# EAGLE board tnychron_1_3 (EAGLE 6.1)
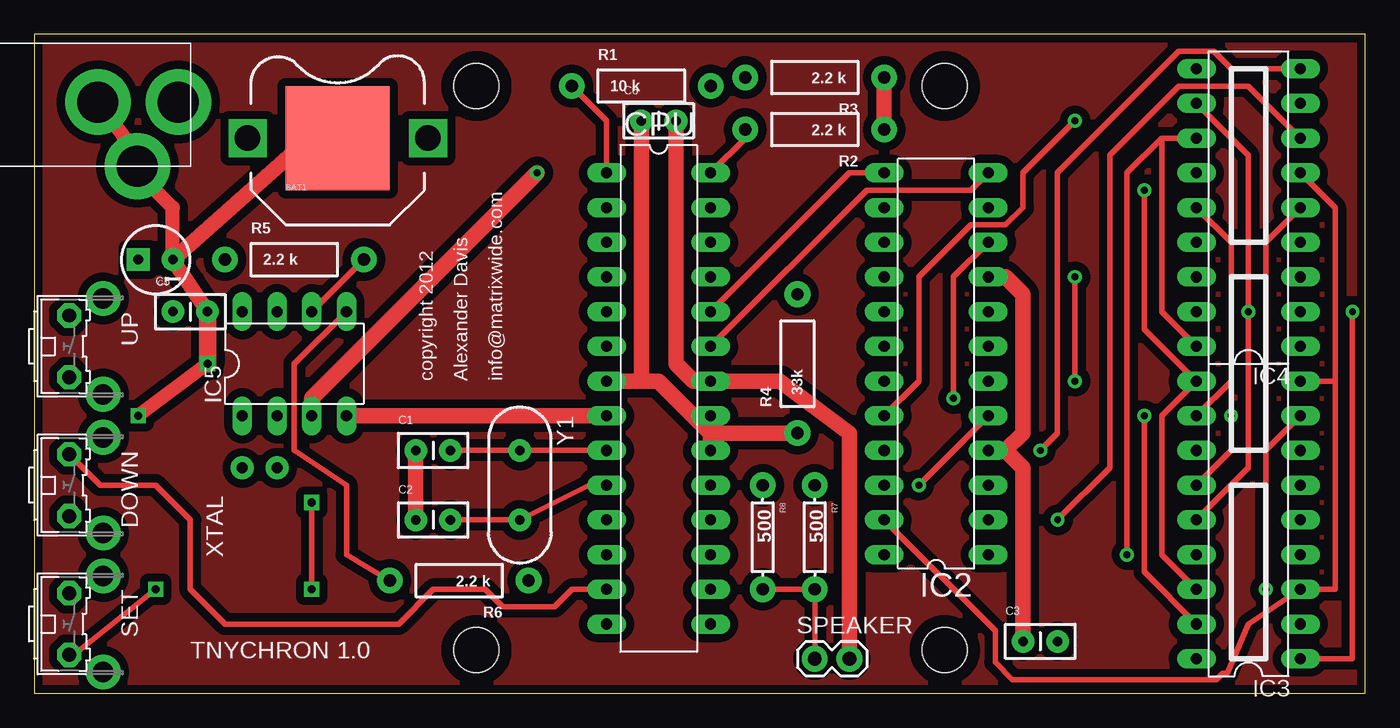
[diagram p0: board, top side]
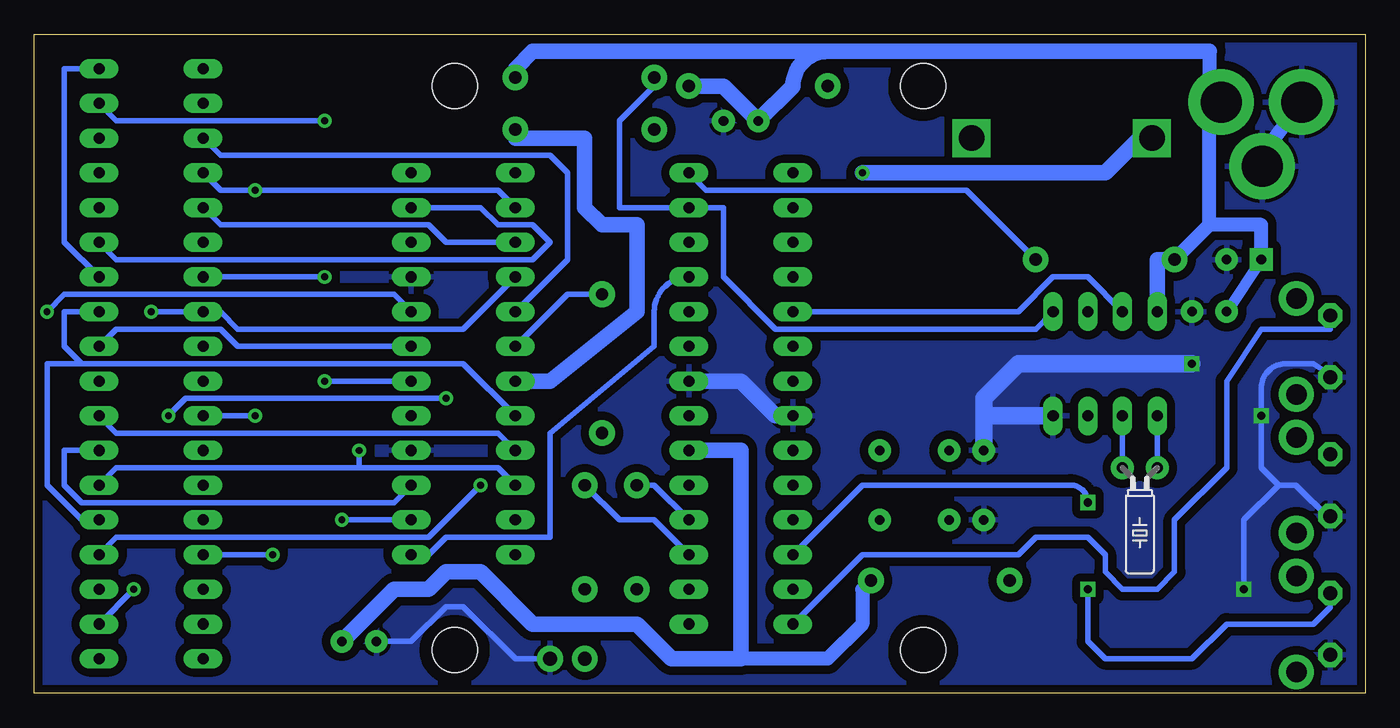
[diagram p1: board, bottom side, seen from below]

Size 97.46 x 48.25 mm. Coordinates in mm from the lower left corner, seen from the top.
Outline: 0,0 97.46,0 97.46,48.25 0,48.25 0,0
Copper layers (1*16): Top 0.035mm / dielectric 1.5mm / Bottom 0.035mm
Design rules: minimum track width 8mil, minimum drill 20mil, track to track 8mil, track to pad 8mil, pad to pad 8mil, via to via 8mil, smd to smd 8mil, copper to edge 10mil, drill to drill 8mil, minimum pad ring 12mil, minimum via ring 10mil, stop-mask expansion 4mil, vias tented up to drill 25mil, thermal gap 10mil
Net classes: 0 default: width 0.406 mm; 1 supply: width 1.143 mm

## Footprints (pad centres in the part's own frame; a part is rotated, then mirrored left to right if it is on the bottom)
BATTCON_12MM_PTH = smd 7.62 x 7.62: GND 0,0 | drill 1.854 square: VCC@1 -6.604,0; VCC@2 6.604,0
CAP-PTH-SMALL2 = drill 0.7 pad 1.651: 1 0,0; 2 2.54,0
CPOL-RADIAL-10UF-25V = drill 0.7 pad 1.651 square: 1 1.27,0 | drill 0.7 pad 1.651: 2 -1.27,0
DIL28-3 = drill 0.813 long: 1 -16.51,-3.81; 2 -13.97,-3.81; 3 -11.43,-3.81; 4 -8.89,-3.81; 5 -6.35,-3.81; 6 -3.81,-3.81; 7 -1.27,-3.81; 8 1.27,-3.81; 9 3.81,-3.81; 10 6.35,-3.81; 11 8.89,-3.81; 12 11.43,-3.81; 13 13.97,-3.81; 14 16.51,-3.81; 15 16.51,3.81; 16 13.97,3.81; 17 11.43,3.81; 18 8.89,3.81; 19 6.35,3.81; 20 3.81,3.81; 21 1.27,3.81; 22 -1.27,3.81; 23 -3.81,3.81; 24 -6.35,3.81; 25 -8.89,3.81; 26 -11.43,3.81; 27 -13.97,3.81; 28 -16.51,3.81
B3F-31XX = drill 1.016 pad 1.778 octagon: 1 -2.261,-1.245; 2 2.261,-1.245 | drill 1.499 pad 2.54: 3 -3.505,1.245; 4 3.505,1.245
DIL24-3 = drill 0.813 long: 1 -13.97,-3.81; 2 -11.43,-3.81; 3 -8.89,-3.81; 4 -6.35,-3.81; 5 -3.81,-3.81; 6 -1.27,-3.81; 7 1.27,-3.81; 8 3.81,-3.81; 9 6.35,-3.81; 10 8.89,-3.81; 11 11.43,-3.81; 12 13.97,-3.81; 13 13.97,3.81; 14 11.43,3.81; 15 8.89,3.81; 16 6.35,3.81; 17 3.81,3.81; 18 1.27,3.81; 19 -1.27,3.81; 20 -3.81,3.81; 21 -6.35,3.81; 22 -8.89,3.81; 23 -11.43,3.81; 24 -13.97,3.81
DIL18 = drill 0.813 long: 1 -10.16,-3.81; 2 -7.62,-3.81; 3 -5.08,-3.81; 4 -2.54,-3.81; 5 0,-3.81; 6 2.54,-3.81; 7 5.08,-3.81; 8 7.62,-3.81; 9 10.16,-3.81; 10 10.16,3.81; 11 7.62,3.81; 12 5.08,3.81; 13 2.54,3.81; 14 0,3.81; 15 -2.54,3.81; 16 -5.08,3.81; 17 -7.62,3.81; 18 -10.16,3.81
DIL08 = drill 0.813 long: 1 -3.81,-3.81; 2 -1.27,-3.81; 3 1.27,-3.81; 4 3.81,-3.81; 5 3.81,3.81; 6 1.27,3.81; 7 -1.27,3.81; 8 -3.81,3.81
AXIAL-0.4 = drill 0.9 pad 1.88: P$1 -5.08,0; P$2 5.08,0
AXIAL-0.3 = drill 0.9 pad 1.88: P$1 -3.81,0; P$2 3.81,0
1X02 = drill 1.016 pad 1.88: 1 0,0; 2 2.54,0
PJ-102A = drill 3 pad 4.8: RING 0.1,-3.39; RING_SW -4.6,-6.29; TIP 0.1,-9.29
STAND-OFF = hole 3.302: 0,0
TC26H = drill 0.813 pad 1.676: 1 -1.27,0; 2 1.27,0
HC49US = drill 0.7 pad 1.651: 1 -2.54,0; 2 2.54,0

## Placement (x,y rotation side)
BAT1  3v  [BATTCON_12MM_PTH]  22.22,40.64 0 top
C1  18 pf  [CAP-PTH-SMALL2]  27.94,17.78 0 top
C2  18 pf  [CAP-PTH-SMALL2]  27.94,12.7 0 top
C3  0.1 uf  [CAP-PTH-SMALL2]  72.39,3.81 0 top
C4  10 uf  [CPOL-RADIAL-10UF-25V]  8.89,31.75 180 top
C5  0.1 uf  [CAP-PTH-SMALL2]  10.16,27.94 0 top
C6  0.1 uf  [CAP-PTH-SMALL2]  44.45,41.91 0 top
CPU  ATMEGA328-PU  [DIL28-3]  45.72,21.59 270 top
DOWN  [B3F-31XX]  3.81,15.24 270 top
IC2  MAX7219CNG  [DIL24-3]  66.04,24.13 90 top
IC3  socket a  [DIL18]  88.9,12.7 90 top
IC4  socket b  [DIL18]  88.9,35.56 90 top
IC5  DS1307  [DIL08]  19.05,24.13 0 top
R1  10 k  [AXIAL-0.4]  44.45,44.45 0 top
R2  2.2 k  [AXIAL-0.4]  57.15,41.28 180 top
R3  2.2 k  [AXIAL-0.4]  57.15,45.08 180 top
R4  33k  [AXIAL-0.4]  55.88,24.13 90 top
R5  2.2 k  [AXIAL-0.4]  19.05,31.75 0 top
R6  2.2 k  [AXIAL-0.4]  31.11,8.25 180 top
R7  500  [AXIAL-0.3]  57.15,11.43 270 top
R8  500  [AXIAL-0.3]  53.34,11.43 270 top
SET  [B3F-31XX]  3.81,5.08 270 top
SPEAKER  [1X02]  57.15,2.54 0 top
U$1  2.1MMJACKTHM  [PJ-102A]  1.27,43.18 90 top
U$4  [STAND-OFF]  66.67,44.45 0 top
U$5  [STAND-OFF]  32.38,44.45 0 top
U$6  [STAND-OFF]  32.38,3.18 0 top
U$7  [STAND-OFF]  66.67,3.18 0 top
UP  [B3F-31XX]  3.81,25.4 270 top
XTAL  32.768 khz  [TC26H]  16.51,16.51 180 bottom
Y1  16 mhz  [HC49US]  35.56,15.24 270 top

## Library data of the parts
BAT1 C1-C6 R1-R8 SPEAKER U$4-U$7 XTAL Y1 = SparkFun
CPU = Arduino-AVR
DOWN IC5 SET U$1 UP = adafruit
IC2 = maxim; MF: MAXIM; MPN: MAX7219CNG; OC_FARNELL: 1523914; OC_NEWARK: 34C4018
IC3 IC4 = ic-package

## Nets
GND [supply]: BAT1.GND C1.1 C2.1 C3.1 C4.2 C5.2 C6.2 CPU.8 CPU.22 DOWN.2 IC2.4 IC2.9 IC5.4 SET.2 SPEAKER.2 U$1.RING U$1.RING_SW UP.2
N$1: CPU.18 R8.P$1
N$2: CPU.1 R1.P$1
N$3: C1.2 CPU.9 Y1.1
N$4: C2.2 CPU.10 Y1.2
N$5: IC2.2 IC4.7
N$6: IC2.11 IC4.4
N$7: CPU.28 IC5.6 R2.P$2 R5.P$2
N$8: CPU.27 IC5.5 R3.P$2 R6.P$2
N$9: CPU.5 IC5.7
N$10: CPU.17 R7.P$1
N$11: IC2.6 IC4.16
N$12: IC2.7 IC4.1
N$13: IC2.18 R4.P$2
N$14: IC2.3 IC3.7
N$15: CPU.23 IC2.12
N$16: CPU.24 IC2.13
N$17: CPU.25 IC2.1
N$18: IC2.10 IC3.13
N$19: IC5.1 XTAL.1
N$20: IC2.5 IC3.4
N$21: IC2.8 IC3.1
N$22 [supply]: BAT1.VCC@1 IC5.3
N$23: IC2.14 IC3.10 IC3.16 IC4.13
N$24: IC2.16 IC3.14 IC4.11 IC4.17
N$25: IC2.20 IC3.5 IC4.2 IC4.8
N$26: IC2.23 IC3.3 IC3.9 IC4.6
N$27: IC2.21 IC3.2 IC3.8 IC4.5
N$28: CPU.12 SET.1
N$29: CPU.13 DOWN.1
N$30: IC2.15 IC3.11 IC3.17 IC4.14
N$31: IC2.17 IC3.15 IC4.12 IC4.18
N$32: IC2.22 IC3.6 IC4.3 IC4.9
N$33: CPU.14 UP.1
N$34: R7.P$2 R8.P$2 SPEAKER.1
N$35: IC5.2 XTAL.2
VCC [supply]: C3.2 C4.1 C5.1 C6.1 CPU.7 CPU.20 CPU.21 IC2.19 IC5.8 R1.P$2 R2.P$1 R3.P$1 R4.P$1 R5.P$1 R6.P$1 U$1.TIP

## Tracks (layer width: path | path; a pad name or v marks a point on that pad's centre or on a via)
GND  (via drill 0.6)
  Top 0.406: 21.59,43.81 21.59,41.91 21.59,40.64 | v8.89,7.62 2.54,2.54
  Top 1.016: C4.2 10.16,35.56 7.62,38.1 U$1.RING_SW 7.62,39.37 U$1.RING | v12.7,24.13 v7.62,20.32
  Top 1.143: C5.2 C4.2 21.59,41.91 BAT1.GND | 71.12,17.78 72.39,16.51 C3.1 | IC2.9 71.12,30.48 72.39,29.21 72.39,19.05 71.12,17.78 | 71.12,17.78 IC2.4 | IC5.4 CPU.8 | C1.1 C2.1 | C6.2 46.99,24.13 48.26,22.86 CPU.22 54.61,22.86 59.69,19.05 SPEAKER.2
  Top 1.27: C5.2 v12.7,24.13
  Bottom 0.406: SPEAKER.2 62.23,2.54 66.04,6.35 67.31,6.35 69.85,3.81 C3.1 | UP.2 2.26,23.14 3.81,24.13 5.82,24.13 arc-90 7.62,22.33 v7.62,20.32 7.62,16.51 6.35,15.24 | 2.54,12.7 5.08,15.24 6.35,15.24 | 6.35,15.24 8.89,12.7 v8.89,7.62
  Bottom 1.016: U$1.RING 7.62,39.37
  Bottom 1.143: CPU.22 45.72,22.86 43.18,20.32 CPU.8
  Bottom 1.27: v12.7,24.13 25.4,24.13 27.94,21.59 27.94,20.32 | 27.94,20.32 C1.1 | IC5.4 27.94,20.32
  pour Bottom (isolate 0.61): 97.79,0 97.79,48.26 0,48.26 0,0
N$1
  Bottom 0.406: CPU.18 52.07,15.24 R8.P$1
N$2
  Top 0.406: CPU.1 41.91,41.91 R1.P$1
N$3
  Top 0.406: CPU.9 Y1.1 C1.2
N$4
  Top 0.406: CPU.10 40.64,15.24 Y1.2 C2.2
N$5  (via drill 0.51)
  Top 0.406: v74.93,12.7 78.74,16.51 78.74,39.37 83.82,44.45 88.9,44.45 IC4.7
  Bottom 0.406: v74.93,12.7 IC2.2
N$6
  Bottom 0.406: IC2.11 64.77,35.56 63.5,34.29 60.96,34.29 59.69,33.02 60.96,31.75 91.44,31.75 IC4.4
N$7
  Top 0.406: CPU.28 52.07,40.64 R2.P$2 | R5.P$2 IC5.6
  Bottom 0.406: CPU.28 48.26,36.83 29.21,36.83 R5.P$2
N$8
  Top 0.406: IC5.5 19.05,24.13 19.05,17.78 22.86,15.24 22.86,10.16 R6.P$2
  Bottom 0.406: IC5.5 24.13,26.67 43.18,26.67 46.99,30.48 46.99,35.56 CPU.27 54.61,35.56 54.61,41.91 52.07,44.45 R3.P$2
N$9
  Bottom 0.406: IC5.7 20.32,30.48 22.86,30.48 25.4,27.94 CPU.5
N$10
  Bottom 0.406: CPU.17 52.07,12.7 54.61,12.7 R7.P$1
N$11  (via drill 0.51)
  Top 0.406: v76.2,30.48 v76.2,22.86
  Bottom 0.406: v76.2,22.86 IC2.6 | IC4.16 v76.2,30.48
N$12
  Bottom 0.406: IC2.7 82.55,25.4 83.82,26.67 91.44,26.67 IC4.1
N$13
  Bottom 0.406: IC2.18 58.42,29.21 R4.P$2
N$14
  Bottom 0.406: IC2.3 71.12,13.97 93.98,13.97 95.25,15.24 95.25,17.78 IC3.7
N$15
  Top 0.406: CPU.23 60.96,36.83 68.58,36.83 IC2.12
N$16
  Top 0.406: CPU.24 59.69,38.1 IC2.13
N$17
  Bottom 0.406: CPU.25 arc-90 52.07,27.94 52.07,25.4 59.69,19.05 59.69,11.43 67.31,11.43 68.58,10.16 IC2.1
N$18  (via drill 0.51)
  Top 0.406: IC3.13 87.63,17.78 v87.63,20.32 | v67.31,21.59 67.31,30.48 IC2.10
  Bottom 0.406: v87.63,20.32 86.36,21.59 v67.31,21.59
N$19
  Bottom 0.406: XTAL.1 IC5.1
N$20  (via drill 0.51)
  Top 0.406: v64.77,15.24 IC2.5
  Bottom 0.406: v64.77,15.24 68.58,11.43 91.44,11.43 IC3.4
N$21  (via drill 0.51)
  Top 0.406: IC3.1 96.52,2.54 v96.52,27.94
  Bottom 0.406: v96.52,27.94 95.25,29.21 71.12,29.21 IC2.8
N$22  (via drill 0.51)
  Top 1.143: IC5.3 20.32,21.59 v36.83,38.1
  Bottom 1.143: v36.83,38.1 19.05,38.1 16.51,40.64 BAT1.VCC@1
N$23  (via drill 0.51)
  Top 0.406: IC3.16 82.55,10.16 82.55,20.32 IC3.10 81.28,26.67 v81.28,36.83
  Bottom 0.406: IC2.14 63.5,36.83 v81.28,36.83 83.82,36.83 IC4.13
N$24  (via drill 0.51)
  Top 0.406: IC3.14 88.9,16.51 v88.9,27.94 88.9,39.37 IC4.11
  Bottom 0.406: IC2.16 66.04,26.67 82.55,26.67 83.82,27.94 IC4.17 v88.9,27.94
N$25  (via drill 0.51)
  Top 0.406: v76.2,41.91 72.39,38.1 72.39,35.56 71.12,34.29 68.58,34.29 64.77,30.48 64.77,22.86 IC2.20
  Bottom 0.406: IC2.20 66.04,24.13 93.98,24.13 | 93.98,24.13 95.25,25.4 95.25,27.94 IC4.2 | IC3.5 93.98,12.7 96.52,15.24 96.52,24.13 93.98,24.13 | IC4.8 91.44,41.91 v76.2,41.91
N$26
  Top 0.406: 95.25,22.86 95.25,35.56 IC4.6 | IC2.23 70.36,4.57 70.36,2.29 71.63,1.02 86.54,1.02 87.02,1.5 87.36,1.5 88.9,5.08 IC3.3 95.25,7.62 95.25,22.86 | 95.25,22.86 IC3.9
N$27  (via drill 0.51)
  Top 0.406: 90.17,17.78 v90.17,7.62 | IC3.8 90.17,17.78 | IC4.5 90.17,33.02 90.17,17.78
  Bottom 0.406: IC2.21 63.5,19.05 91.44,19.05 IC3.8 | v90.17,7.62 IC3.2
N$28  (via drill 0.6)
  Top 0.406: v20.32,13.97 v20.32,7.62
  Bottom 0.406: CPU.12 36.83,15.24 21.59,15.24 arc90 v20.32,13.97 | v20.32,7.62 20.32,3.81 19.05,2.54 12.7,2.54 10.16,5.08 3.81,5.08 2.56,6.32 SET.1
N$29
  Top 0.406: CPU.13 39.37,7.62 38.1,6.35 34.29,6.35 33.02,7.62 29.21,7.62 26.67,5.08 13.97,5.08 11.43,7.62 11.43,12.7 8.89,15.24 4.83,15.24 DOWN.1
N$30  (via drill 0.51)
  Top 0.406: IC3.17 81.28,8.89 v81.28,20.32 | IC3.11 87.63,22.86 87.63,33.02 IC4.14
  Bottom 0.406: IC3.11 v81.28,20.32 | IC2.15 67.31,33.02 68.58,34.29 83.82,34.29 IC4.14
N$31  (via drill 0.51)
  Top 0.406: v80.01,10.16 80.01,38.1 82.55,40.64 | IC4.12 82.55,40.64 | IC4.18 82.55,27.94 82.55,40.64
  Bottom 0.406: IC2.17 58.42,31.75 58.42,38.1 59.69,39.37 83.82,39.37 IC4.12 | v80.01,10.16 IC3.15
N$32  (via drill 0.51)
  Top 0.406: IC4.9 87.63,45.72 86.36,46.99 83.82,46.99 74.93,38.1 74.93,19.05 v73.66,17.78
  Bottom 0.406: IC4.3 95.25,33.02 95.25,45.72 IC4.9 | IC2.22 63.5,16.51 73.66,16.51 | 73.66,16.51 91.44,16.51 IC3.6 | 73.66,16.51 v73.66,17.78
N$33
  Bottom 0.406: CPU.14 36.83,10.16 25.4,10.16 24.13,11.43 20.32,11.43 19.05,10.16 19.05,8.89 17.78,7.62 15.24,7.62 13.97,8.89 13.97,12.7 10.16,16.51 10.16,22.86 7.62,26.67 3.81,26.67 2.56,26.65 UP.1
N$34
  Top 0.406: SPEAKER.1 R7.P$2 R8.P$2
N$35
  Bottom 0.406: XTAL.2 IC5.2
N$36
  pour Top (isolate 0.61): 0,48.26 97.79,48.26 97.79,0 0,0
VCC
  Top 1.143: R2.P$1 R3.P$1 | CPU.21 49.53,19.05 | 49.53,19.05 CPU.20 | 44.45,22.86 45.72,22.86 49.53,19.05 | 44.45,22.86 CPU.7 | 49.53,19.05 R4.P$1 | 44.45,22.86 C6.1
  Bottom 0.813: C4.1 C5.1
  Bottom 1.016: 45.72,2.54 39.37,2.54 36.83,5.08 36.83,7.62 R6.P$1 | C4.1 7.62,34.29 11.43,34.29 | 11.43,34.29 11.43,43.18 | 11.43,43.18 11.43,43.55 | R5.P$1 11.43,34.29 | 11.43,46.99 11.43,43.18 | U$1.TIP 11.43,43.18
  Bottom 1.143: C3.2 71.12,7.62 68.58,7.62 67.31,8.89 64.77,8.89 60.96,5.08 53.34,5.08 50.8,2.54 45.72,2.54 45.72,17.78 CPU.20 | IC2.19 59.69,22.86 53.34,27.94 53.34,34.29 55.88,34.29 57.15,35.56 57.15,40.64 62.23,40.64 R2.P$1 | IC5.8 15.24,31.75 R5.P$1 | R1.P$2 46.99,44.45 C6.1 41.91,44.45 arc90 39.37,46.99 | 39.37,46.99 11.43,46.99 | 39.37,46.99 60.96,46.99 62.23,45.72 R3.P$1

## Text on the board
tSilk: copyright 2012 | Alexander Davis | info@matrixwide.com | TNYCHRON 1.0